# Altium PCB V_4.PcbDoc
Units mil, origin at the board's own origin, x right, y up, seen from the top; angles counter-clockwise.
Board outline 6000 x 4000 mil, 2 copper layers (Top Layer, Bottom Layer); 6 components, 10 nets, 74 pads, 0 vias.
Unrouted connection lines stored in the file: 11.
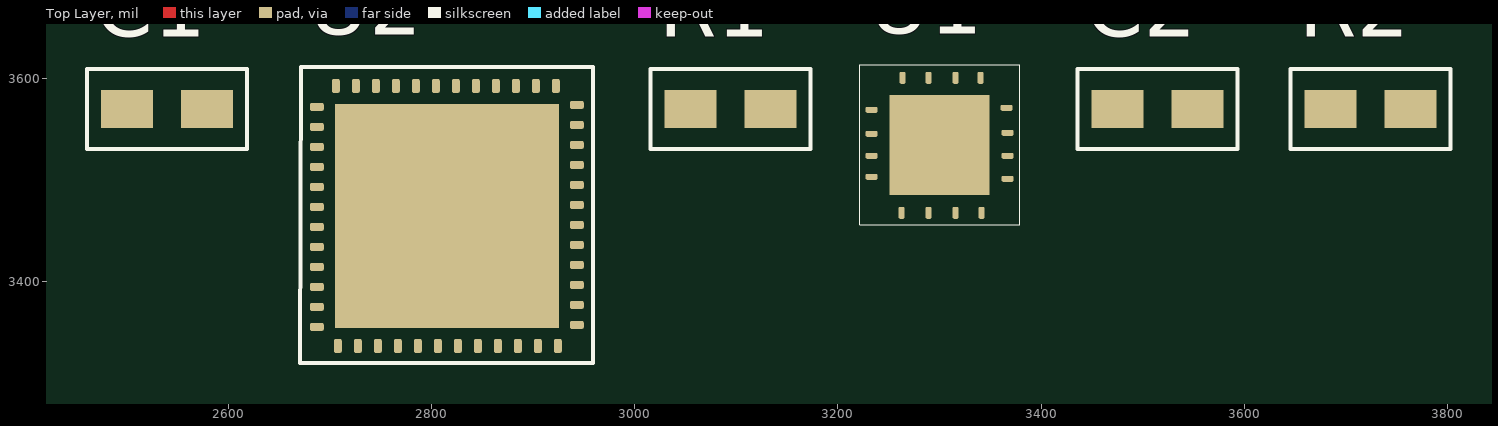
[diagram p0: Top Layer view]
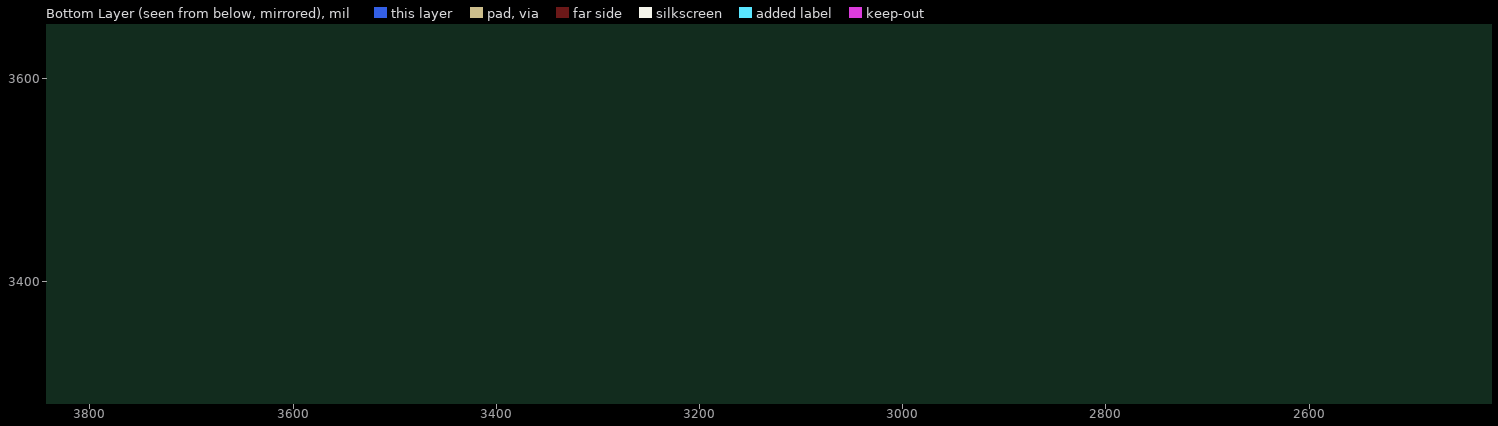
[diagram p1: Bottom Layer view, seen from below]

## Layer stack, top to bottom
Top Layer: signal copper 1.4
Dielectric: dielectric 12.6, FR-4, Dk 4.8
Bottom Layer: signal copper 1.4

## Board outline
1000,1000 7000,1000 7000,5000 1000,5000

## Design rules (kind name [scope] priority, off if disabled: settings)
Clearance [All] p1: gap=10
PolygonConnect [All] p1: connectstyle=Relief reliefconductorwidth=10 reliefentries=4 polygonreliefangle="90 Angle" airgapwidth=10
RoutingVias [All] p1: holewidth=28 width=50 viastyle="Through Hole" minholewidth=28 minwidth=50 maxholewidth=28 maxwidth=50
SilkscreenOverComponentPads SilkToSolderMaskClearance [IsPad] p1: minsilkscreentomaskgap=10
SolderMaskExpansion [All] p1: expansion=4
Width [All] p1: maxlimit=10 minlimit=10 preferedwidth=10
27 further rules are at their usual default settings.

## Components (designator, comment, footprint, x,y, rotation, side; value= is the part's Value field where it differs from the comment)
C1 "2p2" C_0805 2500,3570 r0 top
C2 "2p2" C_0805 3475,3570 r0 top
R1 "6k8" R_0805 3055,3570 r0 top
R2 "2k2" R_0805 3685,3570 r0 top
U1 "Oper  Ampl" ADA4932-1 3300,3535 r0 top
U2 "ADC" ADS61b49 2815,3465 r0 top

## Footprints (in the part's own frame and the unit in brackets; to place one, negate y for a bottom-side part, rotate by r counter-clockwise, add the part's x,y. Pads: shape width x height; smd on the part's side, far side on the other; paste and mask are expansions set on the pad)
ADA4932-1 [mm]
  rrect50% 0.3x0.15 smd: 1(-1.7,0.875) 2(-1.7,0.275) 3(-1.7,-0.275) 4(-1.7,-0.8) 9(1.7,-0.85) 10(1.7,-0.275) 11(1.7,0.3) 12(1.675,0.925)
  rrect50% 0.15x0.3 smd: 5(-0.95,-1.7) 6(-0.275,-1.7) 7(0.4,-1.7) 8(1.05,-1.7) 13(1.025,1.675) 14(0.4,1.675) 15(-0.275,1.675) 16(-0.925,1.675)
  rect 2.5x2.5 smd: 17(0,0)
  silkscreen extent -2,-2 2,2
ADS61b49 [mm]
  rrect50% 0.35x0.2 smd: 1(-3.25,2.725) 2(-3.25,2.225) 3(-3.25,1.725) 4(-3.25,1.225) 5(-3.25,0.725) 6(-3.25,0.225) 7(-3.25,-0.275) 8(-3.25,-0.775) 9(-3.25,-1.275) 10(-3.25,-1.775) 11(-3.25,-2.275) 12(-3.25,-2.775) 25(3.25,-2.725) 26(3.25,-2.225) 27(3.25,-1.725) 28(3.25,-1.225) 29(3.25,-0.725) 30(3.25,-0.225) 31(3.25,0.275) 32(3.25,0.775) 33(3.25,1.275) 34(3.25,1.775) 35(3.25,2.275) 36(3.25,2.775)
  rrect50% 0.2x0.35 smd: 13(-2.725,-3.25) 14(-2.225,-3.25) 15(-1.725,-3.25) 16(-1.225,-3.25) 17(-0.725,-3.25) 18(-0.225,-3.25) 19(0.275,-3.25) 20(0.775,-3.25) 21(1.275,-3.25) 22(1.775,-3.25) 23(2.275,-3.25) 24(2.775,-3.25) 37(2.725,3.25) 38(2.225,3.25) 39(1.725,3.25) 40(1.225,3.25) 41(0.725,3.25) 42(0.225,3.25) 43(-0.275,3.25) 44(-0.775,3.25) 45(-1.275,3.25) 46(-1.775,3.25) 47(-2.275,3.25) 48(-2.775,3.25)
  rect 5.6x5.6 smd: 49(0,0)
  silkscreen extent -3.67,-3.67 3.65,3.72
C_0805 [mm]
  rect 1.3x0.95 smd: 3(0,0) 4(2,0)
  silkscreen extent -1,-1 3,1
R_0805 [mm]
  rect 1.3x0.95 smd: 1(0,0) 2(2,0)
  silkscreen extent -1,-1 3,1

## Part data
C1 C2: library part Capasitor
R1 R2: library part Resistor

## Nets (pads, with @x,y where several pads share a name; then routed paths per layer and width w, separated by ;. In a path a pad name is that pad's centre, name@x,y a point inside that pad or via, vN(x,y) a via of type N, cw(c..) or ccw(c..) an arc to the next point about the centre after c; other vN are vias at no path point)
1.8V: U2.27
3.3V: U2.33 U2.43 U2.45 U2.47 U2.49
+5V: 
-5V: 
GND: C1.3 U2.26 U2.34 U2.37 U2.39 U2.42 U2.44
NetC1_2: R1.1
NetR1_0: 
NetR2_0: 
NetR2_1: R2.1 U2.41
NetU1_25: U2.40
pads on no net: C1.4 C2.3 C2.4 R1.2 R2.2 U1.1 U1.2 U1.3 U1.4 U1.5 U1.6 U1.7 U1.8 U1.9 U1.10 U1.11 U1.12 U1.13 U1.14 U1.15 U1.16 U1.17 U2.1 U2.2 U2.3 U2.4 U2.5 U2.6 U2.7 U2.8 U2.9 U2.10 U2.11 U2.12 U2.13 U2.14 U2.15 U2.16 U2.17 U2.18 U2.19 U2.20 U2.21 U2.22 U2.23 U2.24 U2.25 U2.28 U2.29 U2.30 U2.31 U2.32 U2.35 U2.36 U2.38 U2.46 U2.48